# Altium PCB uMote.PcbDoc
Units mil, origin at the board's own origin, x right, y up, seen from the top; angles counter-clockwise.
Board outline 1710.63 x 1077.76 mil, 2 copper layers (Top Layer, Bottom Layer); 24 components, 29 nets, 127 pads, 21 vias.
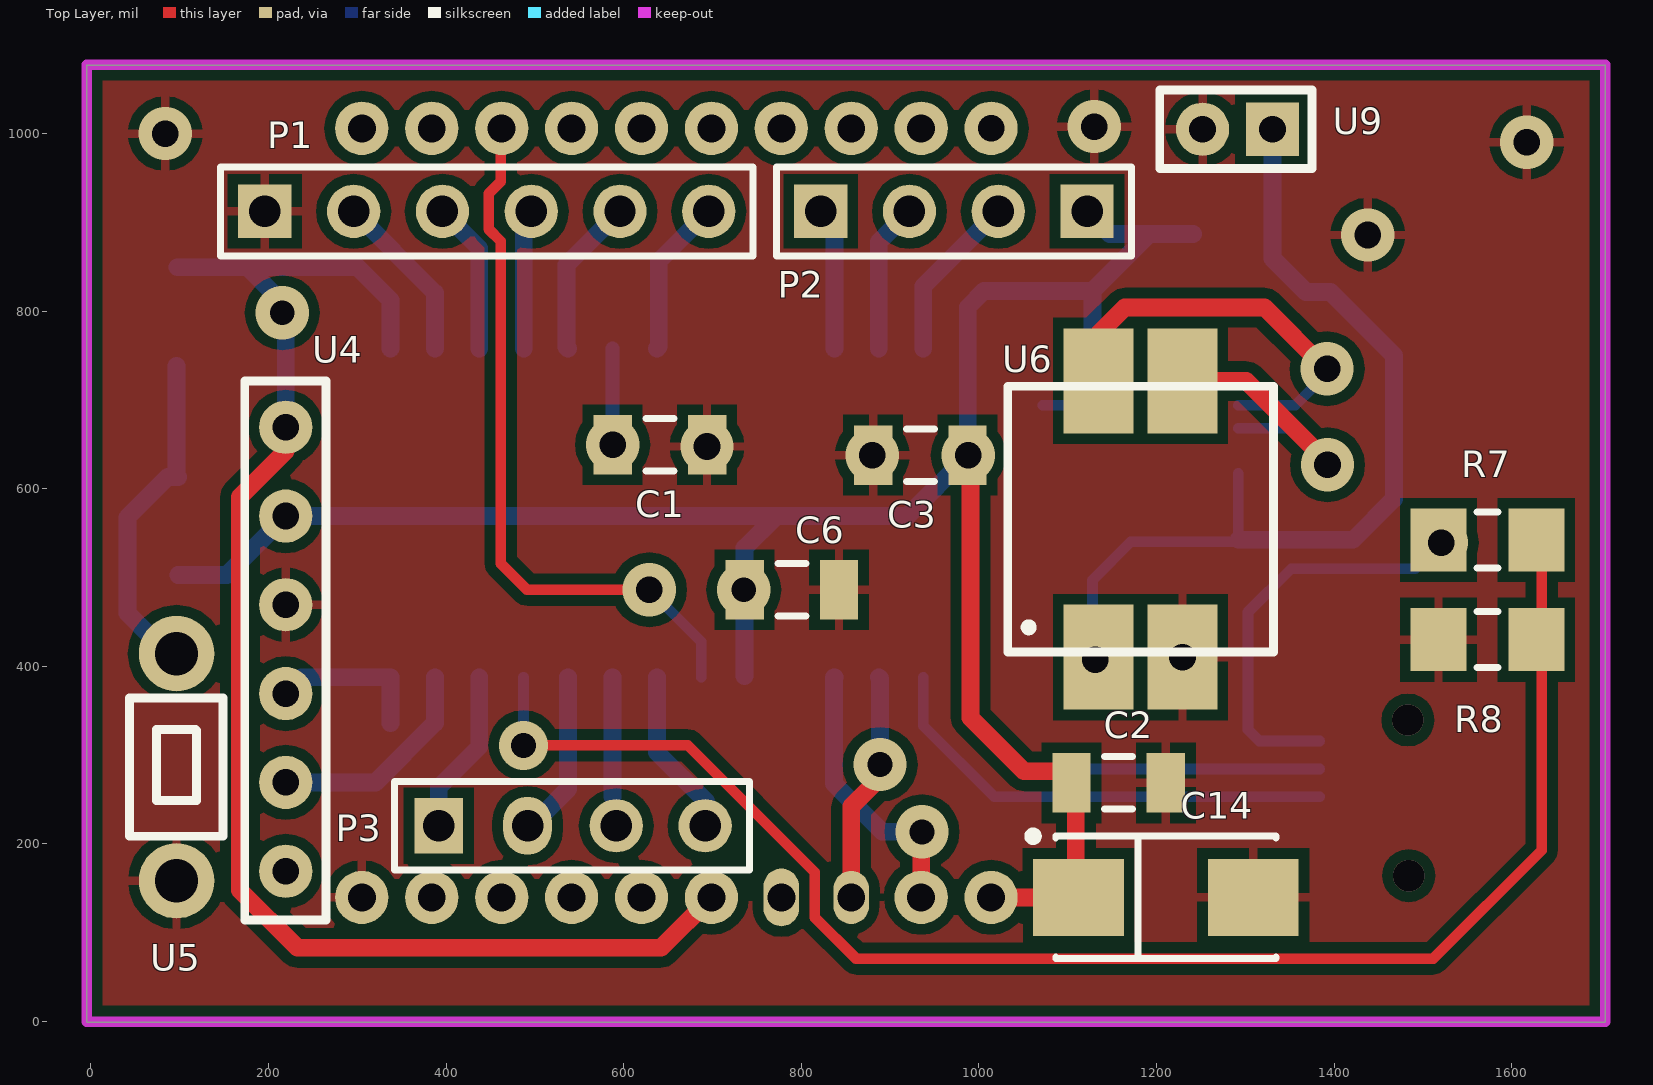
[diagram p0: Top Layer view]
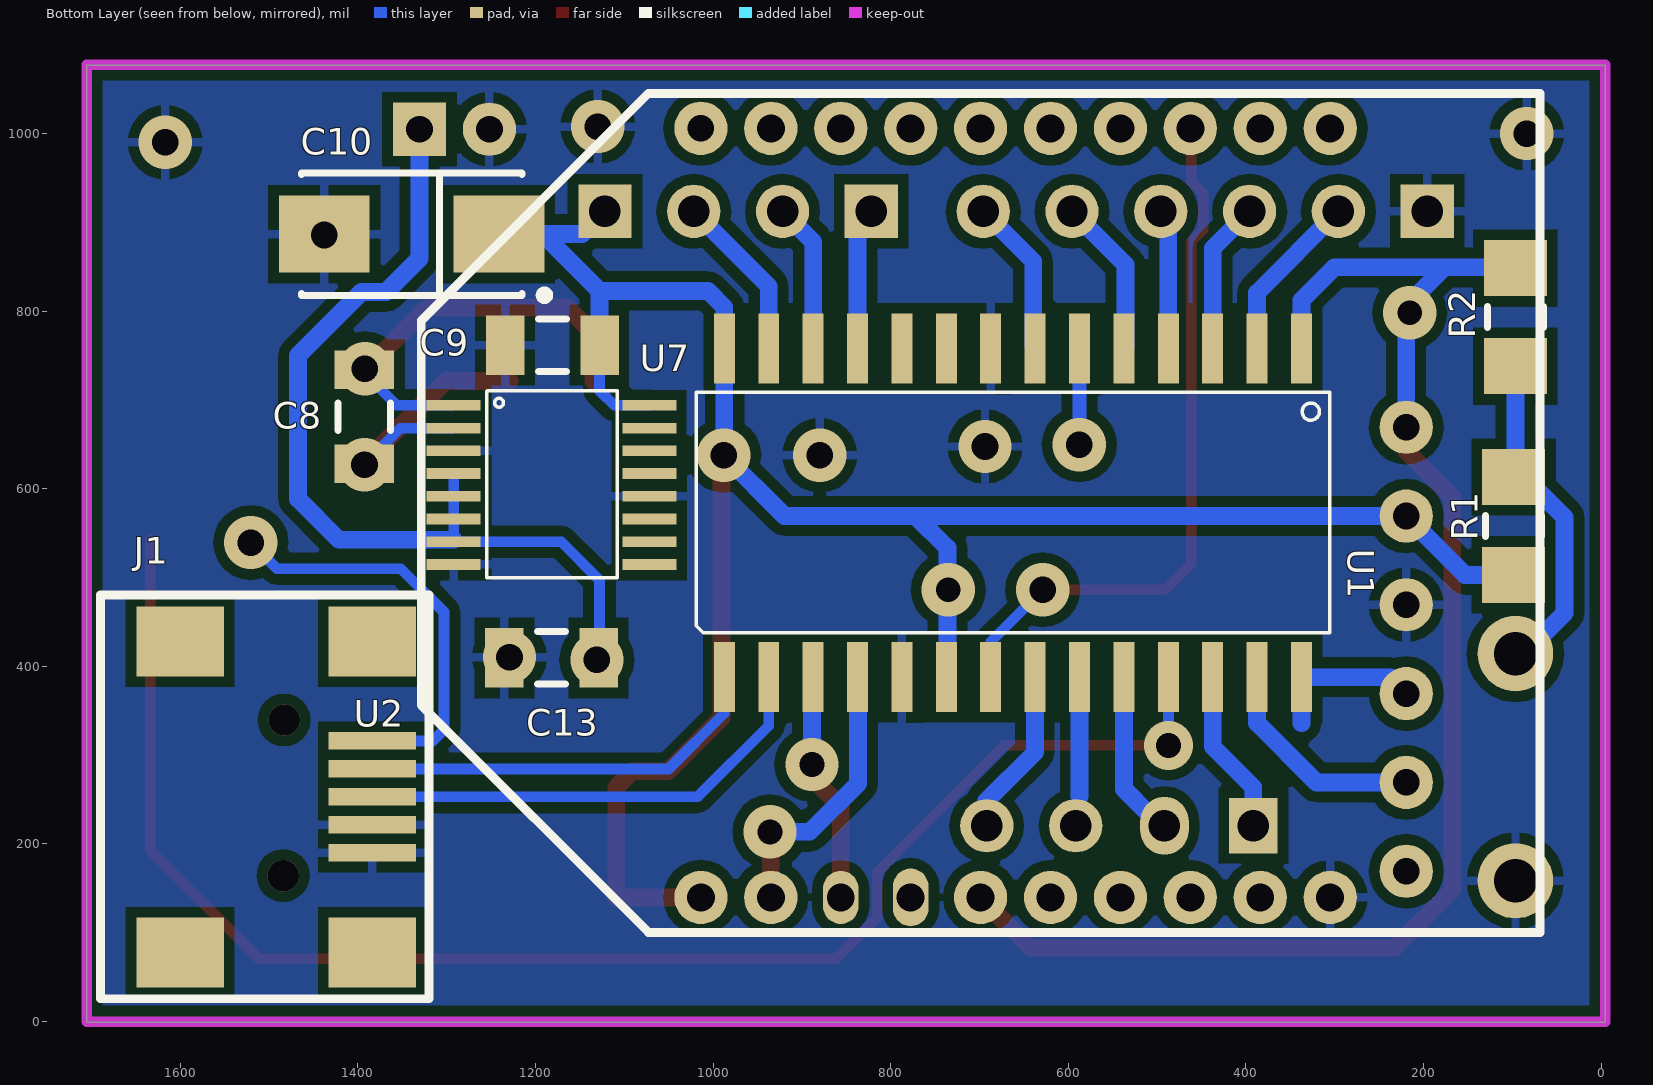
[diagram p1: Bottom Layer view, seen from below]

## Layer stack, top to bottom
Top Layer: signal copper 1.4
Dielectric: core 12.6, FR-4, Dk 4.8
Bottom Layer: signal copper 1.4

## Board outline
-4.92,1076.77 1705.71,1076.77 1705.71,-0.98 -4.92,-0.98

## Design rules (kind name [scope] priority, off if disabled: settings)
Clearance [All] p1: gap=11.81
ComponentClearance [All] p1: gap=10 collisioncheckmode=3 verticalgap=10 showdistances=TRUE
FabricationTestpoint [(IsPad And (OnTopLayer Or OnBottomLayer)) Or (IsVia)] p1: side=3 testpointundercomponent=TRUE minsize=40 maxsize=100 preferedsize=60 minholesize=0 maxholesize=40 preferedholesize=32 testpointgrid=1 allowsidetop=TRUE allowsidebottom=TRUE usegrid=TRUE gridtolerance=0.01 minspacing=10 compbodyclearance=10 boardedgeclearance=10
PolygonConnect [All] p1: connectstyle=Relief reliefconductorwidth=10 reliefentries=4 polygonreliefangle="90 Angle"
RoutingVias [All] p1: holewidth=30 width=60 viastyle="Through Hole" minholewidth=28 minwidth=60 maxholewidth=35 maxwidth=60
SilkscreenOverComponentPads [All] p1: minsilkscreentomaskgap=10
SolderMaskExpansion [All] p1: expansion=8
Width [All] p1: maxlimit=20 minlimit=12 preferedwidth=12 minimp=50.000000 maximp=50.000000 favimp=50.000000 checkconnectedcopper=TRUE
25 further rules are at their usual default settings.

## Classes and differential pairs
component class pic: C1 C2 C3 C6 C14 P1 P2 P3 R1 R2 U1 U2 U4 U5
component class power: C8 C9 C10 C13 J1 R7 R8 U6 U7 U9

## Components (designator, comment, footprint, x,y, rotation, side; value= is the part's Value field where it differs from the comment)
C1 "10uF 10V" C1206 640.75,649.61 r180 top
C2 "0.1uF" C1206 1157.48,268.7 r0 top
C3 "0.1uF 20V" C1206 934.06,637.8 r180 top
C6 "0.1uF" C1206 789.37,486.22 r0 top
C8 "10uF" C1206 1392.72,681.1 r270 bottom
C9 "2.2uF" C1206 1181.1,761.81 r0 bottom
C10 "T491C" C 1339.57,886.81 r0 bottom
C13 "10uF" C1206 1182.09,409.45 r0 bottom
C14 "T491C" C 1210.63,139.76 r0 top
J1 "MiniUSB-B" "MINI USB" 1492.13,252.95 r180 bottom
P1 "Header 6" HDR1X6 195.87,912.4 r0 top
P2 "Header 4" HDR1X4#1 821.85,912.4 r0 top
P3 "Header 4" HDR1X4#2 391.73,220.47 r0 top
R1 "15K" 3216[1206] 98.43,558.07 r90 bottom
R2 "820" 3216[1206] 96.46,793.31 r90 bottom
R7 "56K" 3216[1206] 1572.84,542.32 r180 top
R8 "100K" 3216[1206] 1572.83,430.12 r0 top
U1 "PIC18F26J50" PIC18F-SOIC 662.4,572.83 r270 bottom
U2 "XBee PRO" "XBEE PRO" 659.45,572.83 r90 bottom
U4 "PicKit2" PICKIT3 219.49,669.29 r270 top
U5 "Mini Switch" "Mini Switch" -80.71,414.37 r270 top
U6 "COILTRONICS DRQ74-220" "Trafo Flyback-SEPIC - soldadura manual" 1182.09,565.94 r90 top
U7 "TPS61131" TPS61131 1292.32,693.9 r270 bottom
U9 "Battery" "JST PH" 1330.71,1004.92 r180 top

## Footprints (in the part's own frame and the unit in brackets; to place one, negate y for a bottom-side part, rotate by r counter-clockwise, add the part's x,y. Pads: shape width x height; smd on the part's side, far side on the other; paste and mask are expansions set on the pad)
3216[1206] [mm] "Chip Resistor; Body 3.2 x 1.6 mm (LxW typ)"
  rect 1.6x1.8 smd: 1(-1.4,0) 2(1.4,0)
  silkscreen extent -0.3,-0.8 0.3,0.8
C [mm] "Capacitor, SM Tantalum; Body 6.0 x 3.2 mm (LxW typ)"
  rect 2.6x2.2 smd: 1(-2.5,0) 2(2.5,0)
  silkscreen extent -3.92,-1.75 3.15,1.87
C1206 [mm] "Chip Capacitor, Body 3.2x1.6mm, IPC High Density"
  rect 1.1x1.7 smd: 1(-1.35,0) 2(1.35,0)
  silkscreen extent -0.4,-0.75 0.4,0.75, body extent -1.7,-0.9 1.7,0.9, height 1.3
HDR1X4#1 [mil] "Connector; Header; 4 Position"
  rect 60x60 hole 35.43: 1(0,0) 4(300,0)
  round 60 hole 35.43: 2(100,0) 3(200,0)
  silkscreen extent -50,-50 350,50
HDR1X4#2 [mil] "Connector; Header; 4 Position"
  rect 55x62 hole 35.43: 1(0,0)
  oval 55x65 hole 35.43: 2(100,0)
  round 60 hole 35.43: 3(200,0) 4(300,0)
  silkscreen extent -50,-50 350,50
HDR1X6 [mil] "Connector; Header; 6 Position"
  rect 60x60 hole 35.43: 1(0,0)
  round 60 hole 35.43: 2(100,0) 3(200,0) 4(300,0) 5(400,0) 6(500,0)
  silkscreen extent -50,-50 550,50
"JST PH" [mil]
  rect 60x60 hole 30: 1(0,0)
  round 60 hole 30: 2(78.74,0)
  silkscreen extent -44,-44 127,44
"Mini Switch" [mm]
  round 2.159 hole 1.24: 1(6.5,4.5) 2(0,4.5)
  silkscreen extent 1.27,3.15 5.22,5.82, body extent 1.28,3.18 5.23,5.8, height 2
"MINI USB" [mm]
  rect 2.5x0.5 smd: 1(2.75,1.6) 2(2.75,0.8) 3(2.75,0) 4(2.75,-0.8) 5(2.75,-1.6)
  rect 2.5x2 smd: 6(2.75,4.45) 7(2.75,-4.45) 8(-2.75,-4.45) 9(-2.75,4.45)
  silkscreen extent -5.02,-5.77 4.38,5.77
PIC18F-SOIC [mm]
  rect 2x0.6 smd: 1(-4.7,8.255) 2(-4.7,6.985) 3(-4.7,5.715) 4(-4.7,4.445) 5(-4.7,3.175) 6(-4.7,1.905) 7(-4.7,0.635) 8(-4.7,-0.635) 9(-4.7,-1.905) 10(-4.7,-3.175) 11(-4.7,-4.445) 12(-4.7,-5.715) 13(-4.7,-6.985) 14(-4.7,-8.255) 15(4.7,-8.255) 16(4.7,-6.985) 17(4.7,-5.715) 18(4.7,-4.445) 19(4.7,-3.175) 20(4.7,-1.905) 21(4.7,-0.635) 22(4.7,0.635) 23(4.7,1.905) 24(4.7,3.175) 25(4.7,4.445) 26(4.7,5.715) 27(4.7,6.985) 28(4.7,8.255)
  silkscreen extent -3.45,-9.06 3.43,9.07
PICKIT3 [mil]
  round 60 hole 30: 1(0,0) 2(100,0) 3(200,0) 4(300,0) 5(400,0) 6(500,0)
  silkscreen extent -52,-46 555,45
TPS61131 [mm]
  rect 0.305x1.55 smd: 1(0,0) 2(0.65,0) 3(1.3,0) 4(1.95,0) 5(2.6,0) 6(3.25,0) 7(3.9,0) 8(4.55,0) 9(4.55,5.6) 10(3.9,5.6) 11(3.25,5.6) 12(2.6,5.6) 13(1.95,5.6) 14(1.3,5.6) 15(0.65,5.6) 16(0,5.6)
  silkscreen extent -0.42,0.95 4.93,4.68
"Trafo Flyback-SEPIC - soldadura manual" [mm] "Trafo SMD Flyback-SEPIC DRQ74"
  rect 3x2 smd: 1(-3.95,1.2) 2(-3.95,-1.2) 3(3.95,-1.2) 4(3.95,1.2)
  silkscreen extent -3.8,-3.8 3.8,3.8
"XBEE PRO" [mm]
  round 1.524 hole 0.8: 1(-11,9) 2(-11,7) 5(-11,1) 6(-11,-1) 7(-11,-3) 8(-11,-5) 9(-11,-7) 10(-11,-9) 11(11,-9) 12(11,-7) 13(11,-5) 14(11,-3) 15(11,-1) 16(11,1) 17(11,3) 18(11,5) 19(11,7)
  oval 1.524x1.016 hole 0.8: 3(-11,5)
  oval 1.651x1.016 hole 0.8: 4(-11,3)
  round 1.524 hole 0.762: 20(11,9)
  silkscreen extent -12,-15 12,17, body extent -12,-15.07 12,17, height 10

## Part data
C1 C2 C3 C6 C8 C9: library part "TDK C3216X7R1C106K"
C10 C14: "Solid Tantalum Chip Capacitor, Standard T491 Series - Industrial Grade"
C13: library part "TDK C3216X7R1C106K", "4.7uF"
P1: "Header, 6-Pin"
P2 P3: "Header, 4-Pin"
R1 R2: library part "RES 1206"
R7 R8: library part "Res Semi", "Semiconductor Resistor"

## Via types
v1: diameter 60, hole 30, Top Layer to Bottom Layer, 14 vias
v2: diameter 60, hole 28, Top Layer to Bottom Layer, 4 vias
v3: diameter 35.43, hole 35.43, Top Layer to Bottom Layer, 2 vias
v4: diameter 55, hole 28, Top Layer to Bottom Layer, 1 vias

## Nets (pads, with @x,y where several pads share a name; then routed paths per layer and width w, separated by ;. In a path a pad name is that pad's centre, name@x,y a point inside that pad or via, vN(x,y) a via of type N, cw(c..) or ccw(c..) an arc to the next point about the centre after c; other vN are vias at no path point)
D+: J1.3 U1.16 | length 534.3
  Bottom Layer w12: U1.16 937.4,333.27 1017.72,252.95 J1.3
D-: J1.2 U1.15 | length 463
  Bottom Layer w12: U1.15 987.4,347.24 1050.2,284.45 J1.2
GND: C1.1 C2.2 C3.2 C6.2 C9.2 C10.2 C13.2 C14.2 J1.4 J1.5 P1.1 R8.1 U1.8 U1.19 U2.10 U4.3 U5.1 U6.2 U7.3 U7.8 U7.12 U9.2
  other v1: 1229.33,410.43 879.92,637.8 693.9,647.64 1437.99,885.83 1617.13,990.16 83.66,1000 1129.92,1007.87
NetC1_2: C1.2 U1.6 | length 108.3
  Bottom Layer w15.75: U1.6 587.6,757.68 v1(587.6,649.61)
NetC8_1: C8.1 U6.4 U7.1 | length 472.1
  Top Layer w20: U6.4 1134.84,774.6 1164.37,804.13 1321.85,804.13 1390.75,735.24 v1(1392.22,735.24)
  Bottom Layer w12: U7.1 1356.3,693.9 C8.1@1392.72,730.32 ; v1(1392.22,735.24) 1395.67,731.79 C8.1@1395.67,731.3
NetC8_2: C8.2 U6.3 U7.2 | length 319.8
  Top Layer w20: U6.3 1301.18,721.46 v1@1392.72,629.92
  Bottom Layer w12: U7.2 1352.36,668.31 C8.2 C8.2@1393.7,628.94
  other v1: 1392.72,626.97
NetP1_2: P1.2 U1.2 | length 192.4
  Bottom Layer w20: P1.2 387.4,820.86 U1.2
NetP1_3: P1.3 U1.3 | length 171.7
  Bottom Layer w20: P1.3 437.4,870.86 U1.3
NetP1_4: P1.4 U1.4 | length 158
  Bottom Layer w20: U1.4 487.4,903.94 P1.4
NetP1_5: P1.5 U1.5 | length 180.2
  Bottom Layer w20: U1.5 535.63,759.64 535.63,852.17 P1.5
NetP1_6: P1.6 U1.7 | length 178.7
  Bottom Layer w20: U1.7 639.63,760.11 639.63,856.17 P1.6
NetP2_1: P2.1 U1.11 | length 161
  Bottom Layer w20: P2.1 837.4,896.85 U1.11
NetP2_2: P2.2 U1.12 | length 168.8
  Bottom Layer w20: U1.12 887.4,877.95 P2.2
NetP2_3: P2.3 U1.13 | length 189.5
  Bottom Layer w20: U1.13 937.4,827.95 P2.3
NetP3_1: P3.1 U1.26 | length 186.2
  Bottom Layer w20: P3.1 391.73,263.78 437.4,309.45 U1.26
NetP3_2: P3.2 U1.24 | length 167.3
  Bottom Layer w20: P3.2@508.17,232.58 537.4,261.81 U1.24
NetP3_3: P3.3 U1.23 | length 135
  Bottom Layer w20: U1.23 587.4,253.35 587.79,252.95
NetP3_4: P3.4 U1.22 | length 190.3
  Bottom Layer w20: U1.22 637.4,303.35 692.91,247.83 P3.4@692.91,220.47
NetR1_2: R1.2 R2.1 U5.2 | length 383.9
  Bottom Layer w20: U5.2 86.61,414.37 41.18,459.8 41.18,567.76 86.61,613.19 R1.2 96.46,615.16 R2.1
NetU1_17: U1.17 U2.3 | length 262.1
  Top Layer w20: U2.3 856.3,242.13 888.78,274.61 v2(888.78,289.37)
  Bottom Layer w20: U1.17 888.78,386.42 v2(888.78,289.37)
NetU1_18: U1.18 U2.2 | length 314.5
  Top Layer w20: U2.2 v2@935.04,212.6
  Bottom Layer w20: U1.18 836.97,387.36 836.97,267.91 891.3,213.58 v2(936.02,213.58)
NetU1_21: U1.21 U2.13 | length 804.2
  Top Layer w12: U2.13 461.61,1004.92 461.61,946.03 447.87,932.28 447.87,892.52 461.61,878.77 461.61,515.75 491.14,486.22 v1(628.94,486.22)
  Bottom Layer w12: v1(628.94,486.22) 687.4,427.76 U1.21
NetU1_27: U1.27 U4.5 | length 247.2
  Bottom Layer w20: U4.5 320.47,269.29 387.4,336.22 U1.27
NetU1_28: U1.28 U4.4 | length 177.8
  Bottom Layer w20: U4.4@219.1,369.69 237.21,387.8 U1.28 337.4,335.83
RESET: R2.2 U1.1 U2.5 U4.1 | length 1632.2
  Top Layer w20: U4.1 219.49,642.56 167.68,590.75 167.68,147.83 232.56,82.95 642.01,82.95 U2.5
  Bottom Layer w20: R2.2@97.44,849.41 176.18,849.41 ; U4.1 219.49,806.1 176.18,849.41 ; U1.1 337.4,812.2 300.2,849.41 176.18,849.41
  other v2: 215.55,798.23
USB_ATTACH: R7.1 R8.2 U1.25 | length 1752.7
  Top Layer w12: v4(487.2,311.02) 672.27,311.02 815.37,167.93 815.37,117.22 861.72,70.87 1511.81,70.87 1633.86,192.91 R7.1@1633.86,542.32
  Bottom Layer w12: v4(487.2,311.02) 487.2,387.6 U1.25
VBAT: C13.1 U6.1 U7.4 U7.5 U7.6 U7.7 U9.1 | length 1030.6
  Bottom Layer w12: C13.1@1127.95,405.51 1127.95,497.05 1171.26,540.35 U7.7@1288.89,540.35 ; U7.7 1292.32,542.57 U7.6 U7.5 U7.4
  Bottom Layer w20: U7.7@1292.32,542.57 1421.51,542.57 1467.52,588.58 1467.52,750 1396.02,821.5 1368.46,821.5 1330.71,859.25 U9.1
  other v1: 1130.91,407.48
VCC: C2.1 C3.1 C6.1 C9.1 C10.1 C14.1 P2.4 R1.1 U1.14 U1.20 U2.1 U4.2 U7.16 | length 2528.9
  Top Layer w20: C6.1@736.22,478.35 C6.1@743.11,485.24 ; C3.1 990.65,634.35 990.65,342.03 1050.96,281.71 1091.32,281.71 C2.1 1109.25,263.78 C14.1@1109.25,139.76 ; U2.1 C14.1@1109.25,139.76 ; C14.1@1109.25,138.78 C14.1@1109.25,139.76
  Bottom Layer w12: U7.16 1111.22,693.9 1127.95,710.63 C9.1
  Bottom Layer w20: R1.1 153.15,502.95 U4.2 ; U4.2@220.47,569.29 772.05,569.29 ; U1.20@736.22,388.98 736.22,533.46 772.05,569.29 ; P2.4 1147.44,886.81 C10.1@1191.93,886.81 ; C9.1 1127.95,822.83 ; C10.1 C10.1@1191.93,886.81 ; 772.05,569.29 919.69,569.29 v1(988.19,637.8) 987.4,638.58 U1.14 987.4,804.33 1005.91,822.83 1127.95,822.83 ; 1127.95,822.83 C10.1@1191.93,886.81
  other v2: 735.24,486.22
VUSB: J1.1 R7.2 | length 468.4
  Bottom Layer w12: J1.1 1315.94,315.94 1303.15,328.74 1303.15,461.21 1351.78,509.84 1491.14,509.84 v1(1520.67,539.37)
pads on no net: J1.6 J1.7 J1.8 J1.9 U1.9 U1.10 U2.4 U2.6 U2.7 U2.8 U2.9 U2.11 U2.12 U2.14 U2.15 U2.16 U2.17 U2.18 U2.19 U2.20 U4.6 U7.9 U7.10 U7.11 U7.13 U7.14 U7.15
copper on no net:
  other v3: 1484.25,164.37 1483.27,339.57

## Polygon pours and split planes (outlines as drawn)
GND on Top Layer "GND_PLANE" (solid, pour order 4): -4.92,1068.9 1700.79,1068.9 1700.79,3.04 1697.78,0 -4.92,0
GND on Bottom Layer "GND_PLANE" (solid, pour order 3): -6.89,1070.87 1705.71,1070.87 1705.71,3.04 1702.69,0 -6.89,0

## Keep-outs
Keep-Out Layer:
  lines w11.81: -4.92,0 -4.92,1077.76 1705.71,1077.76 1705.71,0 -4.92,0

## Silkscreen, mask and mechanical layers (free items; w line width, h text height)
Drill Drawing:
  text ".LEGEND" at -120.08,-204.72 h30
  text "Drill Drawing." at -115.16,-262.8 h30

## Dimensions
-4.92,0 to -4.92,1077.76 on Mechanical 1
-4.92,0 to 1705.71,0 on Mechanical 1